# Altium PCB PCB2.PcbDoc
Units mil, origin at the board's own origin, x right, y up, seen from the top; angles counter-clockwise.
Board outline 2620 x 1880 mil, 2 copper layers (Top Layer, Bottom Layer); 8 components, 16 nets, 76 pads, 2 vias.
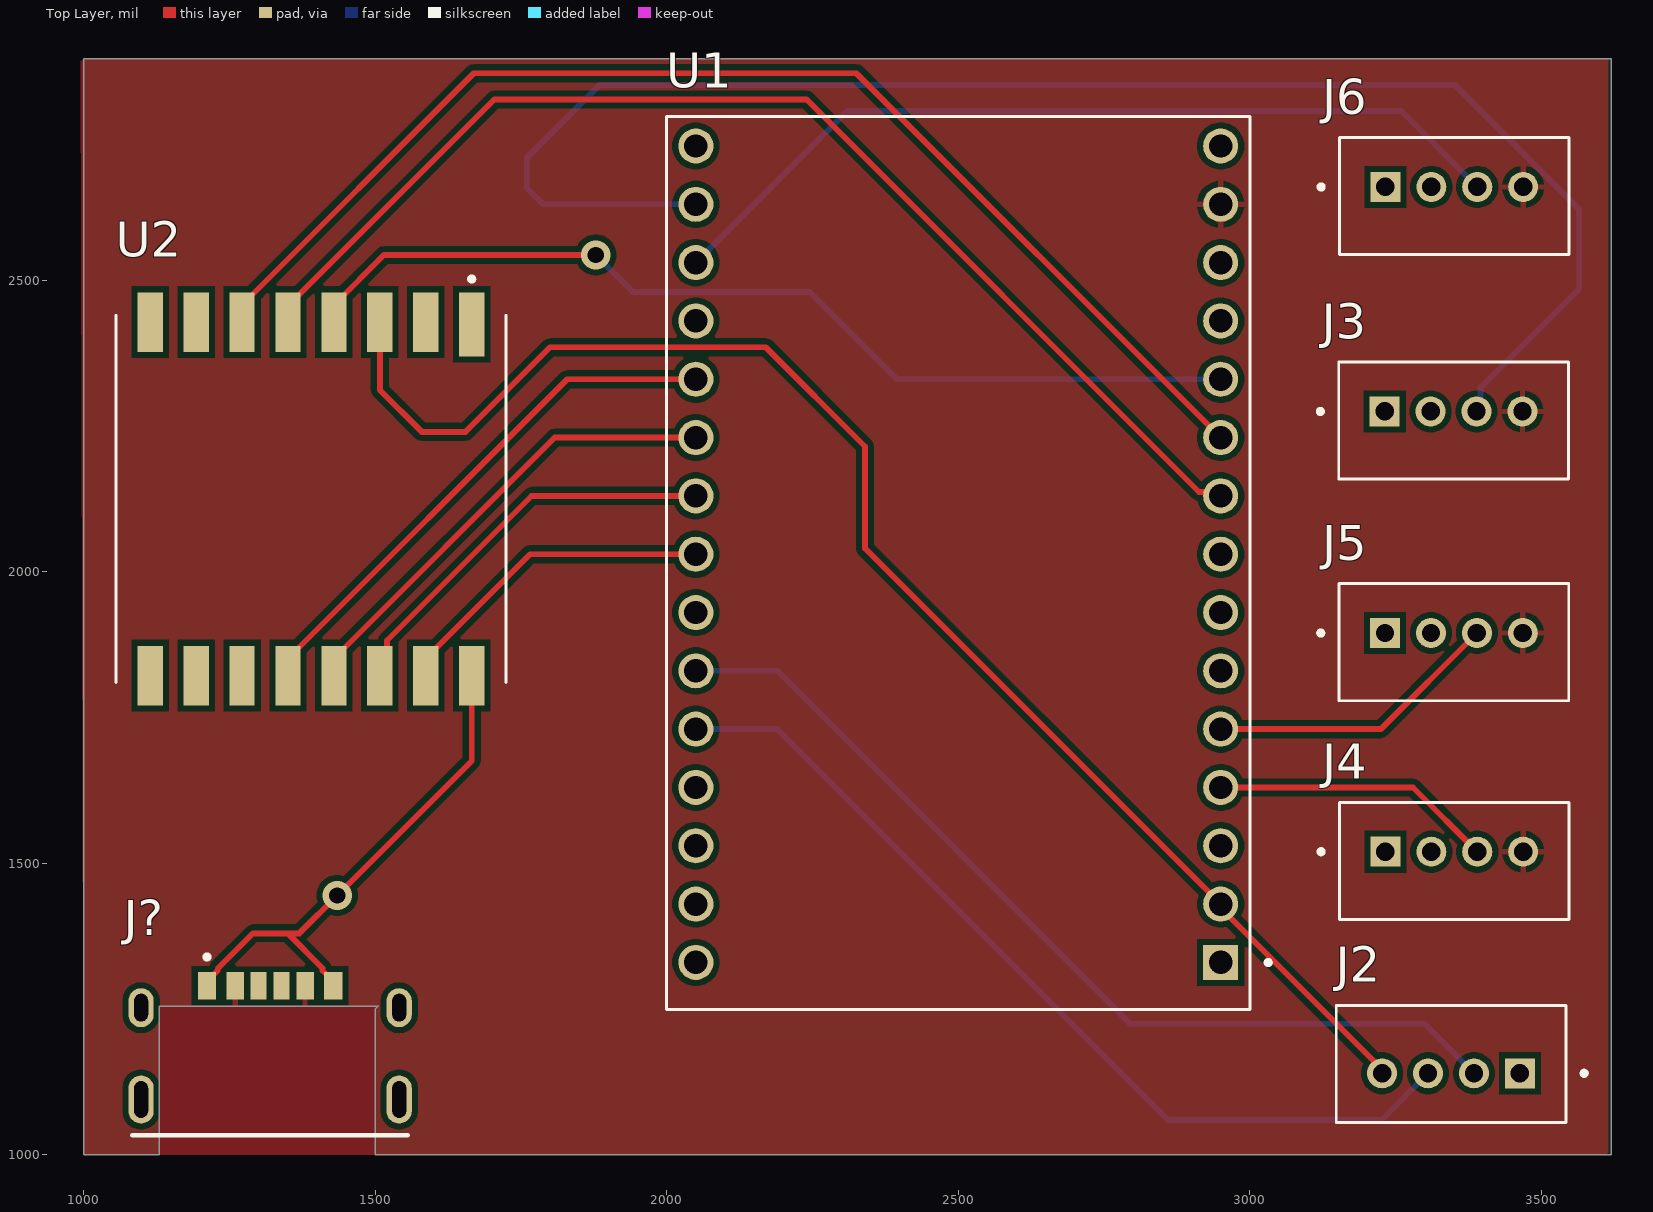
[diagram p0: Top Layer view]
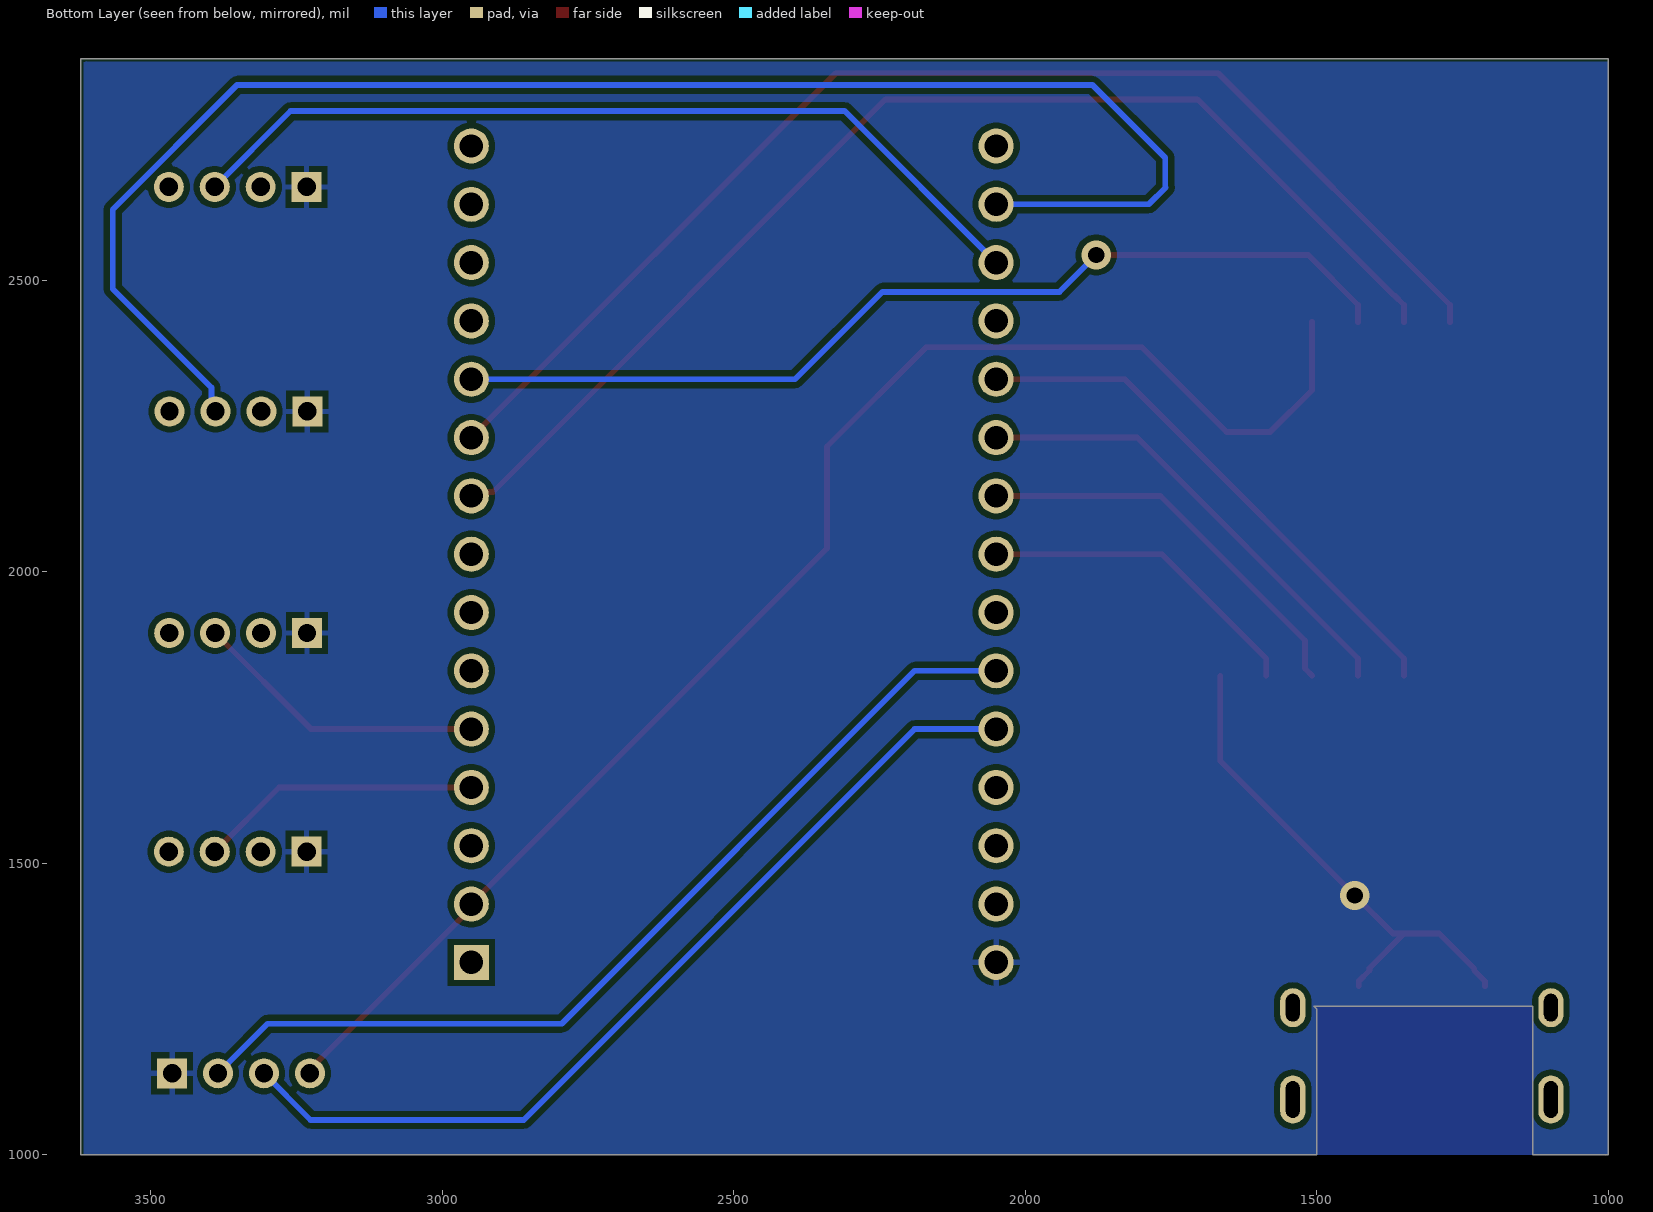
[diagram p1: Bottom Layer view, seen from below]
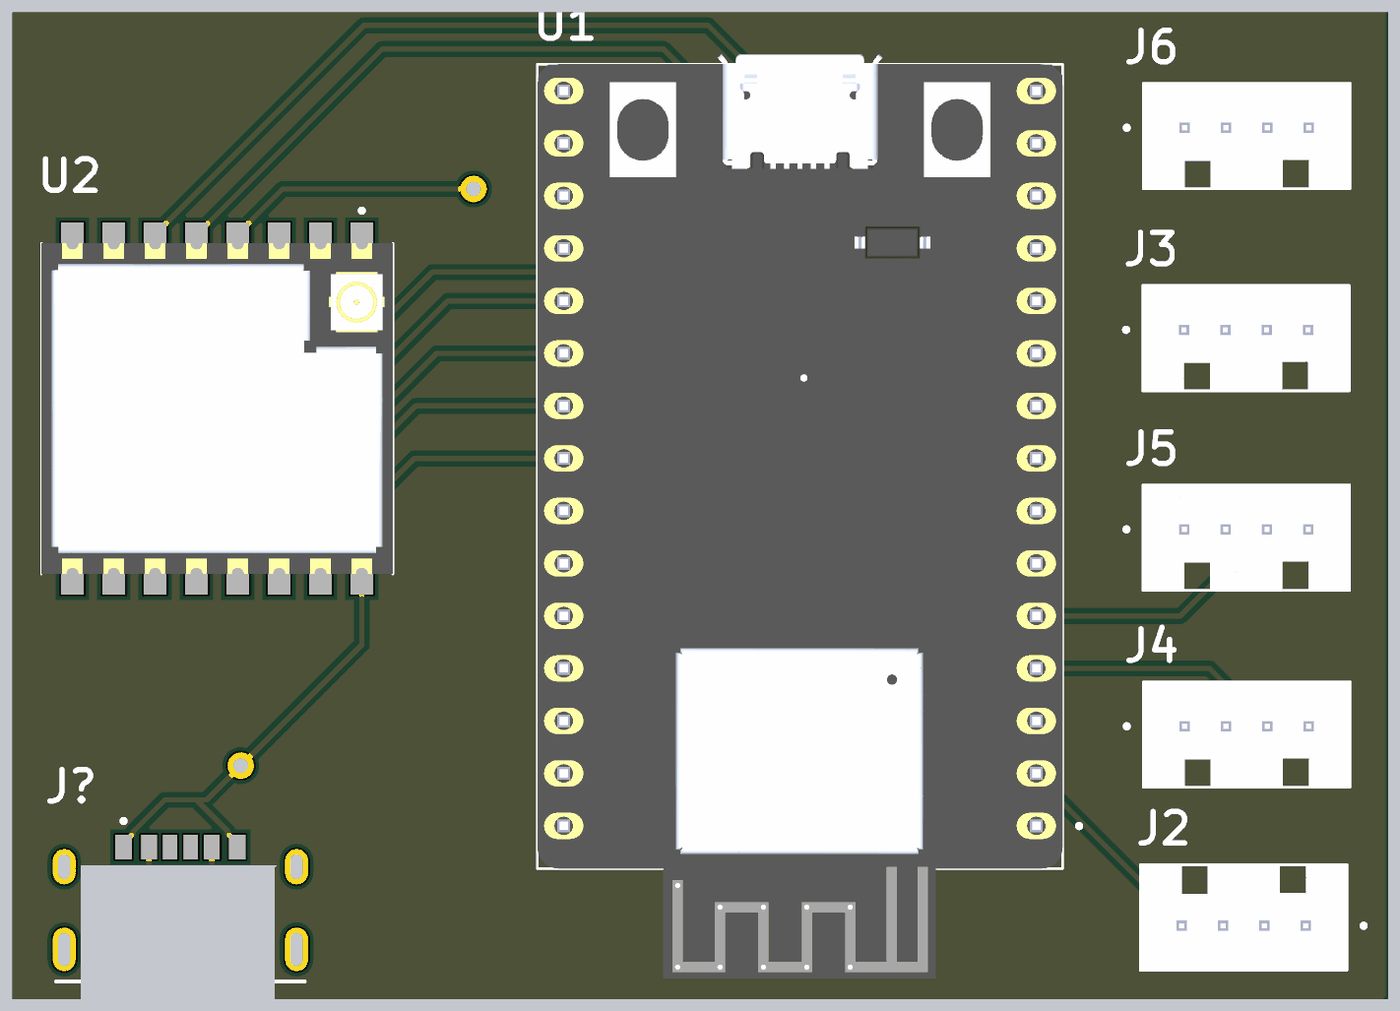
[diagram p2: 3D render of the assembled board from above, using the file's embedded part models]

## Layer stack, top to bottom
Top Solder: solder mask 0.4, Solder Resist, Dk 3.5
Top Layer: signal copper 1.4
Dielectric 1: dielectric 12.6, FR-4, Dk 4.8
Bottom Layer: signal copper 1.4
Bottom Solder: solder mask 0.4, Solder Resist, Dk 3.5

## Board outline
1130,1000 1130,1255 1505,1255 1500,1250 1500,1000 3620,1000 3620,2880 1000,2880 1000,1000

## Design rules (kind name [scope] priority, off if disabled: settings)
Clearance [All] p1: gap=10 ignorepadtopadclearanceinfootprint=FALSE except(0: Arc-Hole Track-Hole SMDPad-Hole THPad-Hole Via-Hole Fill-Hole Poly-Hole Region-Hole Text-Hole)
PolygonConnect [All] p1: connectstyle=Relief reliefconductorwidth=10 reliefentries=4 polygonreliefangle="90 Angle" airgapwidth=10
RoutingVias [All] p1: holewidth=28 width=50 viastyle="Through Hole" minholewidth=28 minwidth=50 maxholewidth=28 maxwidth=50
SolderMaskExpansion [All] p1: expansion=4 istentingtop=FALSE
Width [All] p1: maxlimit=10 minlimit=10 preferedwidth=10
30 further rules are at their usual default settings.

## Components (designator, comment, footprint, x,y, rotation, side; value= is the part's Value field where it differs from the comment)
J2 "CO2_sens" SEEED_110990030 3345,1140 r180 top
J3 "IR_Sens" SEEED_110990030 3349.37,2275 r0 top
J4 "IR_Sens" SEEED_110990030 3350.63,1520 r0 top
J5 "IR_Sens" SEEED_110990030 3350,1895 r0 top
J6 "IR_Sens" SEEED_110990030 3350.63,2660 r0 top
J? "USB4515-GF-A_REVA" GCT_USB4515-GF-A_REVA 1320,1095 r0 top
U1 "ESP32-C3-DEVKITM-1" XCVR_ESP32-C3-DEVKITM-1 2500,2015 r180 top
U2 "RA-02_LORA" MODULE_RA-02_LORA 1390,2125 r270 top

## Footprints (in the part's own frame and the unit in brackets; to place one, negate y for a bottom-side part, rotate by r counter-clockwise, add the part's x,y. Pads: shape width x height; smd on the part's side, far side on the other; paste and mask are expansions set on the pad)
GCT_USB4515-GF-A_REVA [mm]
  rect 0.7x1.2 smd: A5(-0.5,4.95) B5(0.5,4.95)
  rect 0.76x1.2 smd: A9(1.52,4.95) B9(-1.52,4.95)
  rect 0.8x1.2 smd: A12(2.75,4.95) B12(-2.75,4.95)
  oval 1.1x2.1 hole 0.6 slot 1.6 at 90 deg: S1(-5.62,0) S2(5.62,0)
  oval 1.1x1.7 hole 0.6 slot 1.2 at 90 deg: S3(-5.62,4) S4(5.62,4)
  silkscreen extent -6,-1.55 6,6.31
MODULE_RA-02_LORA [mm]
  rect 2.8x1.1 smd: 1(-7.6,7)
  rect 2.6x1.1 smd: 2(-7.7,5) 3(-7.7,3) 4(-7.7,1) 5(-7.7,-1) 6(-7.7,-3) 7(-7.7,-5) 8(-7.7,-7) 9(7.7,-7) 10(7.7,-5) 11(7.7,-3) 12(7.7,-1) 13(7.7,1) 14(7.7,3) 15(7.7,5) 16(7.7,7)
  silkscreen extent -9.68,-8.5 8,8.5, body extent -8,-8.5 8,8.5, height 3.3
SEEED_110990030 [mm]
  rect 1.308x1.308 hole 0.8: 1(-3,0)
  round 1.308 hole 0.8: 2(-1,0) 3(1,0) 4(3,0)
  silkscreen extent -5.9,-2.95 5,2.15, body extent -5,-2.95 5,2.15, height 8.1
XCVR_ESP32-C3-DEVKITM-1 [mm]
  rect 1.53x1.53 hole 1.02: 1(-11.43,17.395)
  round 1.53 hole 1.02: 2(-11.43,14.855) 3(-11.43,12.315) 4(-11.43,9.775) 5(-11.43,7.235) 6(-11.43,4.695) 7(-11.43,2.155) 8(-11.43,-0.385) 9(-11.43,-2.925) 10(-11.43,-5.465) 11(-11.43,-8.005) 12(-11.43,-10.545) 13(-11.43,-13.085) 14(-11.43,-15.625) 15(-11.43,-18.165) 16(11.43,-18.165) 17(11.43,-15.625) 18(11.43,-13.085) 19(11.43,-10.545) 20(11.43,-8.005) 21(11.43,-5.465) 22(11.43,-2.925) 23(11.43,-0.385) 24(11.43,2.155) 25(11.43,4.695) 26(11.43,7.235) 27(11.43,9.775) 28(11.43,12.315) 29(11.43,14.855) 30(11.43,17.395)
  silkscreen extent -13.6,-19.46 12.7,19.46, body extent -12.7,-19.94 12.7,24.78, height 7.14

## Part data
J2 J3 J4 J5 J6: library part 110990030, Package=None, Availability=Unavailable, MF="{'manufacturer': u'Seeed Technology'}", MP=110990030, Price=None
J? U1: Package=None, Availability=Unavailable, Price=None
  J?: MF="{'manufacturer': u'Global Connector Technology'}", MP=USB4515-GF-A_REVA
  U1: MF="{'manufacturer': u'Espressif Systems'}", MP=ESP32-C3-DEVKITM-1
U2: "Ra-02 LoRa RF M5Stack Platform Evaluation Expansion Board", Package=None, Availability=Unavailable, MF="{'manufacturer': u'AI-Thinker'}", MP=RA-02_LORA, Price=None

## Via types
v1: diameter 50, hole 28, Top Layer to Bottom Layer, 2 vias

## Nets (pads, with @x,y where several pads share a name; then routed paths per layer and width w, separated by ;. In a path a pad name is that pad's centre, name@x,y a point inside that pad or via, vN(x,y) a via of type N, cw(c..) or ccw(c..) an arc to the next point about the centre after c; other vN are vias at no path point)
3V3_vcc: J2.4 U1.2 U2.3 | length 2550.8
  Top Layer w10: U2.3 1508.11,2311.89 1580,2240 1655,2240 1800,2385 2170,2385 2340,2215 2340,2040.16 U1.2 2950,1423.52 3226.89,1146.63 J2.4
5V_VDC: J3.4 J4.4 J5.4 J6.4 J?.A9 J?.B9 U1.14
DIO0: U1.9 U2.5 | length 2056.4
  Top Layer w10: U2.5 1350.63,2457.68 1367.28,2474.33 1368.79,2474.33 1704.46,2810 2240,2810 2913.02,2136.98 2943.18,2136.98 U1.9
DIO1: U1.10 U2.6 | length 2131
  Top Layer w10: U2.6 1271.89,2457.68 1669.21,2855 2325.16,2855 U1.10
GND: J2.1 J3.1 J4.1 J5.1 J6.1 J?.A12 J?.B12 U1.30 U2.16 | length 889.1
  Top Layer w10: J?.B12 1211.73,1297.76 1230.2,1316.22 1230.2,1319.72 1290.48,1380 1350,1380 ; J?.A12 1428.27,1297.76 1409.8,1316.22 1409.8,1320.2 1350,1380 ; U2.16 1665.59,1675.59 v1(1435,1445) 1370,1380 1350,1380
I2C_SCL: J2.3 U1.26 | length 1566.4
  Bottom Layer w10: U1.26 2189.84,1730.16 2860,1060 3225.63,1060 J2.3
I2C_SDA: J2.2 U1.25 | length 1620.2
  Bottom Layer w10: U1.25 2189.84,1830.16 2795,1225 3299.37,1225 J2.2
MISO: U1.21 U2.13 | length 807.1
  Top Layer w10: U2.13 1429.37,1851.38 1808.15,2230.16 U1.21
MOSI: U1.22 U2.14 | length 697.8
  Top Layer w10: U2.14 1520.28,1834.02 1520.28,1882.17 1768.27,2130.16 U1.22
NSS: U1.23 U2.15 | length 566.7
  Top Layer w10: U2.15 1586.85,1851.38 1765.63,2030.16 U1.23
O2_Sens_DOut0: J6.3 U1.18 | length 1501.5
  Bottom Layer w10: U1.18 2309.84,2790 3260,2790 J6.3
O2_Sens_DOut1: J3.3 U1.17 | length 2718.7
  Bottom Layer w10: U1.17 1788.13,2630.16 1759.14,2659.14 1760,2660 1760,2710 1885,2835 3351.37,2835 3565,2621.37 3565,2485 3395.75,2315.75 3395.75,2282.01 J3.3
O2_Sens_DOut2: J5.3 U1.5 | length 507.7
  Top Layer w10: U1.5 3224.53,1730.16 J5.3
O2_Sens_DOut3: J4.3 U1.4 | length 485.6
  Top Layer w10: U1.4 3279.84,1630.16 J4.3
RST: U1.11 U2.4 | length 1673.9
  Top Layer w10: U2.4 1429.37,2457.68 1514.98,2543.28 v1(1878.28,2543.28)
  Bottom Layer w10: v1(1878.28,2543.28) 1941.57,2480 2245,2480 2394.84,2330.16 U1.11
SPI_CLK: U1.20 U2.12 | length 927.2
  Top Layer w10: U2.12 1350.63,1851.38 1829.41,2330.16 U1.20
pads on no net: J3.2 J4.2 J5.2 J6.2 J?.A5 J?.B5 J?.S1 J?.S2 J?.S3 J?.S4 U1.1 U1.3 U1.6 U1.7 U1.8 U1.12 U1.13 U1.15 U1.16 U1.19 U1.24 U1.27 U1.28 U1.29 U2.1 U2.2 U2.7 U2.8 U2.9 U2.10 U2.11

## Polygon pours and split planes (outlines as drawn)
5V_VDC on Top Layer "NONET_L02_P-001" (solid, pour order 0): 995,2875 1000,2880 3615,2880 3615,1005 3610,1000 1000,1000
GND on Bottom Layer "NONET_L02_P-001" (solid, pour order 1): 1000,2875 3610,2875 3615,2880 3615,1000 1005,1000 1000,995

## Text inside footprints (layer, text, board x,y; h text height)
J?: Mechanical 13 "PCB EDGE" at 1581.42,1039.88 h16